# Altium PCB HU_revC.PcbDoc (part 1 of 5)
Units mm, origin at the board's own origin, x right, y up, seen from the top; angles counter-clockwise.
Board outline 391 x 236 mm, 6 copper layers (Top Layer, Layer 1, Layer 2, Layer 3, Layer 4, Bottom Layer), stack 1.538 mm thick; 737 components, 574 nets, 2599 pads, 143 vias.
Unrouted connection lines stored in the file: 1682.
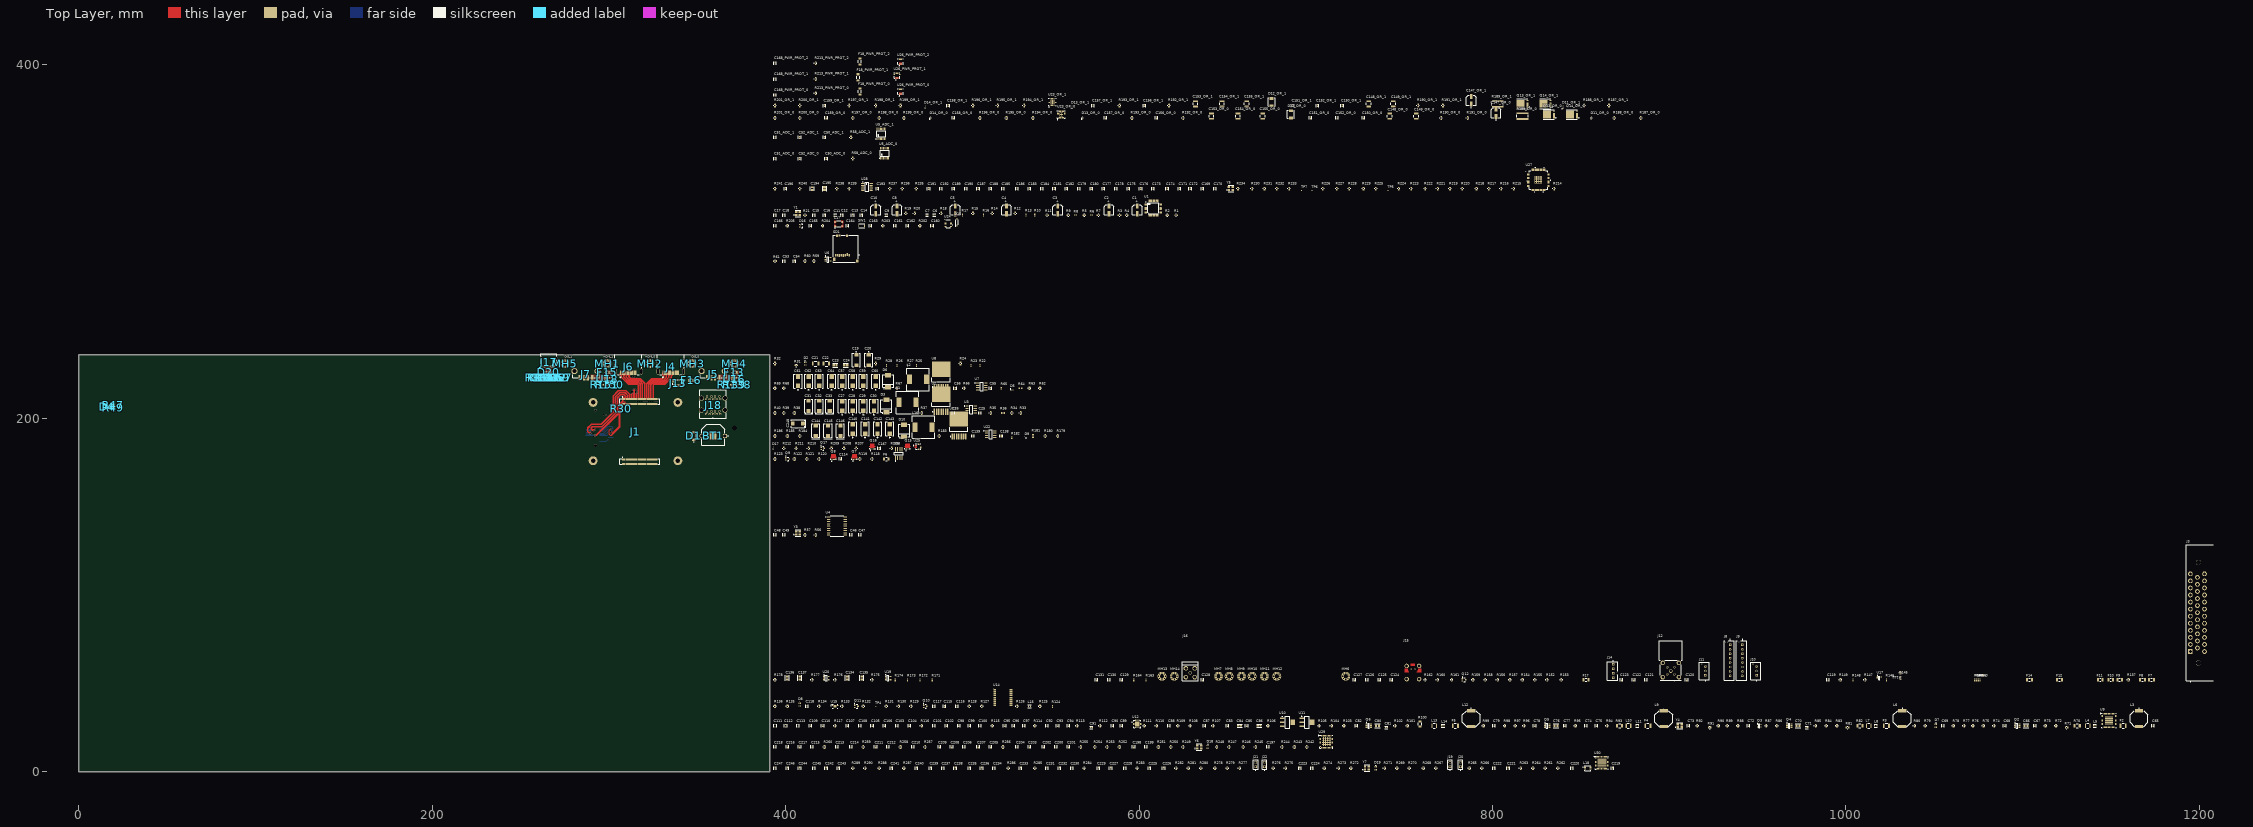
[diagram p0: Top Layer view]
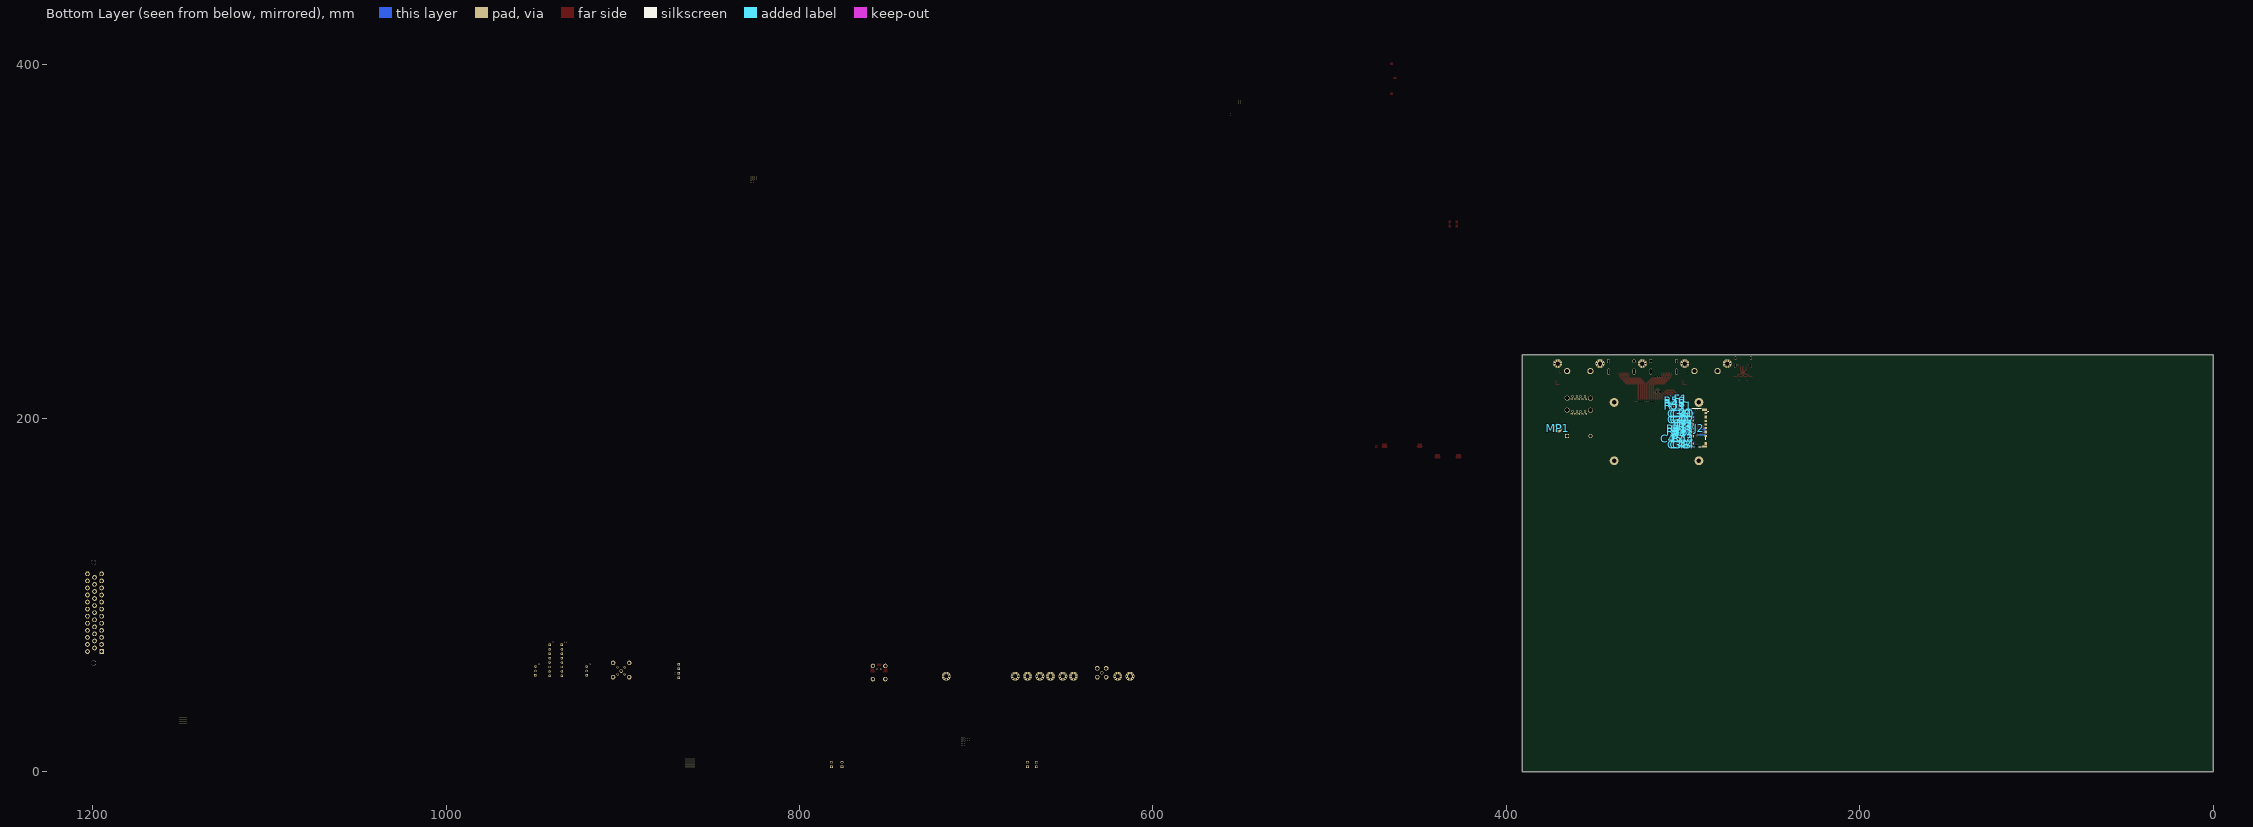
[diagram p1: Bottom Layer view, seen from below]

## Layer stack, top to bottom
Top Solder: solder mask 0.0102, Solder Resist, Dk 3.5
Top Layer: signal copper 0.035
Dielectric 2: prepreg 0.0994, PP-006, Dk 4.1
Layer 1: signal copper 0.0152
Dielectric 3: prepreg 0.55, PP-006, Dk 4.1
Layer 2: signal copper 0.0152
Dielectric 1: dielectric 0.1088, FR-4, Dk 4.8
Layer 3: signal copper 0.0152
Dielectric 4: prepreg 0.55, PP-006, Dk 4.1
Layer 4: signal copper 0.0152
Dielectric 5: prepreg 0.0994, PP-006, Dk 4.1
Bottom Layer: signal copper 0.035
Bottom Solder: solder mask 0.0102, Solder Resist, Dk 3.5

## Board outline
0,0 0,236 391,236 391,0

## Design rules (kind name [scope] priority, off if disabled: settings)
BoardOutlineClearance [All] p1: gap=0.2 ignorepadtopadclearanceinfootprint=FALSE
Clearance IMPEDANCE_CLEARANCE [All vs InDifferentialPairClass('100DIFF') OR InDifferentialPairClass('90DIFF') OR InDifferentialPairClass('85DIFF')] p1: gap=0.089 ignorepadtopadclearanceinfootprint=FALSE except(0.127: Arc-Via Track-Via SMDPad-Via THPad-Via Via-Via Via-Fill Via-Poly Via-Region Via-Text; 0.25: Arc-Hole Track-Hole SMDPad-Hole THPad-Hole Via-Hole Fill-Hole Poly-Hole Region-Hole Text-Hole; 0.5: Arc-Fill Arc-Poly Arc-Region Track-Fill Track-Poly Track-Region SMDPad-Fill SMDPad-Poly SMDPad-Region)
Clearance [All] p2: gap=0.089 ignorepadtopadclearanceinfootprint=FALSE except(0.127: Arc-Via Track-Via SMDPad-Via THPad-Via Via-Via Via-Fill Via-Poly Via-Region Via-Text; 0.25: Arc-Hole Track-Hole SMDPad-Hole THPad-Hole Via-Hole Fill-Hole Poly-Hole Region-Hole Text-Hole)
ComponentClearance [All] p1: gap=0.089 collisioncheckmode=3 verticalgap=0.089 showdistances=TRUE
DiffPairsRouting 85DIFF [InDifferentialPairClass('85DIFF')] p1: maxlimit=0.2 minlimit=0.127 mostfreqgap=0.127 toplayer_mingap=0.2 toplayer_prefgap=0.2 toplayer_minwidth=0.178 toplayer_maxwidth=0.178 toplayer_prefwidth=0.178 midlayer1_maxgap=0.127 midlayer1_minwidth=0.124 midlayer1_maxwidth=0.124 midlayer1_prefwidth=0.124 midlayer2_maxgap=0.127 midlayer2_minwidth=0.119 midlayer2_maxwidth=0.119 midlayer2_prefwidth=0.119 midlayer3_maxgap=0.127 midlayer3_minwidth=0.119 midlayer3_maxwidth=0.119 midlayer3_prefwidth=0.119 midlayer4_maxgap=0.127 midlayer4_minwidth=0.124 midlayer4_maxwidth=0.124 midlayer4_prefwidth=0.124 bottomlayer_mingap=0.2 bottomlayer_prefgap=0.2 bottomlayer_minwidth=0.178 bottomlayer_maxwidth=0.178 bottomlayer_prefwidth=0.178 impedanceprofiledriven=TRUE impedanceprofileid={A2A8C06F-FA96-42DC-BCD0-D0D531981970} impedanceprofilevalue=85.000000 maxuncoupledlength=12.7
DiffPairsRouting 90DIFF [InDifferentialPairClass('90DIFF')] p2: maxlimit=0.2 minlimit=0.127 mostfreqgap=0.127 toplayer_mingap=0.2 toplayer_prefgap=0.2 toplayer_minwidth=0.158 toplayer_maxwidth=0.158 toplayer_prefwidth=0.158 midlayer1_maxgap=0.127 midlayer1_minwidth=0.108 midlayer1_maxwidth=0.108 midlayer1_prefwidth=0.108 midlayer2_maxgap=0.127 midlayer2_minwidth=0.102 midlayer2_maxwidth=0.102 midlayer2_prefwidth=0.102 midlayer3_maxgap=0.127 midlayer3_minwidth=0.102 midlayer3_maxwidth=0.102 midlayer3_prefwidth=0.102 midlayer4_maxgap=0.127 midlayer4_minwidth=0.108 midlayer4_maxwidth=0.108 midlayer4_prefwidth=0.108 bottomlayer_mingap=0.2 bottomlayer_prefgap=0.2 bottomlayer_minwidth=0.158 bottomlayer_maxwidth=0.158 bottomlayer_prefwidth=0.158 impedanceprofiledriven=TRUE impedanceprofileid={85B4657C-B9EF-4066-BB58-2F5B942DC9EC} impedanceprofilevalue=90.000000 maxuncoupledlength=12.7
DiffPairsRouting 100DIFF [InDifferentialPairClass('100DIFF')] p3: maxlimit=0.2 minlimit=0.127 mostfreqgap=0.127 toplayer_mingap=0.2 toplayer_prefgap=0.2 toplayer_minwidth=0.123 toplayer_maxwidth=0.123 toplayer_prefwidth=0.123 midlayer1_maxgap=0.127 midlayer1_minwidth=0.081 midlayer1_maxwidth=0.081 midlayer1_prefwidth=0.081 midlayer2_maxgap=0.127 midlayer2_minwidth=0.076 midlayer2_maxwidth=0.076 midlayer2_prefwidth=0.076 midlayer3_maxgap=0.127 midlayer3_minwidth=0.076 midlayer3_maxwidth=0.076 midlayer3_prefwidth=0.076 midlayer4_maxgap=0.127 midlayer4_minwidth=0.081 midlayer4_maxwidth=0.081 midlayer4_prefwidth=0.081 bottomlayer_mingap=0.2 bottomlayer_prefgap=0.2 bottomlayer_minwidth=0.123 bottomlayer_maxwidth=0.123 bottomlayer_prefwidth=0.123 impedanceprofiledriven=TRUE impedanceprofileid={B7FB8E5D-11C6-4135-B5AE-39F97BF86465} impedanceprofilevalue=100.000000 maxuncoupledlength=12.7
DiffPairsRouting [All] p4: maxlimit=0.089 minlimit=0.089 mostfreqgap=0.089 toplayer_minwidth=0.089 toplayer_maxwidth=1816.048 toplayer_prefwidth=0.089 midlayer1_minwidth=0.089 midlayer1_maxwidth=1816.048 midlayer1_prefwidth=0.089 midlayer2_minwidth=0.089 midlayer2_maxwidth=1816.048 midlayer2_prefwidth=0.089 midlayer3_minwidth=0.089 midlayer3_maxwidth=1816.048 midlayer3_prefwidth=0.089 midlayer4_minwidth=0.089 midlayer4_maxwidth=1816.048 midlayer4_prefwidth=0.089 bottomlayer_minwidth=0.089 bottomlayer_maxwidth=1816.048 bottomlayer_prefwidth=0.089 maxuncoupledlength=12.7
Height [All] p1: minheight=0 maxheight=1816.048 prefheight=12.7
HoleSize [All] p1: absolutevalues=TRUE maxlimit=6.3 minlimit=0.2 maxpercent=80.000 minpercent=20.000
HoleToHoleClearance [All] p1: gap=0.25 allowstackedmicrovias=FALSE
MatchedLengths RGMII_8870_TX [InNetClass('RGMII_8870_TX')] p1: tolerance=1 checknetsindiffpair=FALSE checkdiffpairvsdiffpair=TRUE checkxsignals=TRUE checkothers=TRUE
MatchedLengths RGMII_8870_RX [InNetClass('RGMII_8870_RX')] p2: tolerance=1 checknetsindiffpair=FALSE checkdiffpairvsdiffpair=TRUE checkxsignals=TRUE checkothers=TRUE
MinimumAnnularRing [All] p1: minimumring=0.076
MinimumSolderMaskSliver [All] p1: minsoldermaskwidth=0
PlaneClearance [All] p1: clearance=0.089
PlaneConnect PlaneConnectPowerPads [InPadClass('PowerPads')] p1: planeconnectstyle=Direct reliefexpansion=0.508 reliefentries=4 reliefconductorwidth=0.254 reliefairgap=0.254
PlaneConnect [All] p2: pad.planeconnectstyle=Relief pad.reliefexpansion=0.3 pad.reliefentries=4 pad.reliefconductorwidth=0.089 pad.reliefairgap=0.089 via.planeconnectstyle=Direct via.reliefexpansion=0.3 via.reliefentries=4 via.reliefconductorwidth=0.127 via.reliefairgap=0.127
PolygonConnect PolygonConnectPowerPads [All vs InNetClass('PWR')] p1: connectstyle=Direct reliefconductorwidth=0.254 reliefentries=4 polygonreliefangle="90 Angle" airgapwidth=0.254
PolygonConnect [All] p2: thpad.connectstyle=Relief thpad.reliefconductorwidth=0.089 thpad.reliefentries=4 thpad.polygonreliefangle="90 Angle" thpad.airgapwidth=0.089 smdpad.connectstyle=Relief smdpad.reliefconductorwidth=0.089 smdpad.reliefentries=4 smdpad.polygonreliefangle="90 Angle" smdpad.airgapwidth=0.089 via.connectstyle=Direct via.reliefconductorwidth=0.127 via.reliefentries=4 via.polygonreliefangle="90 Angle" via.airgapwidth=0.127
RoutingVias [All] p1: holewidth=0.2 width=0.45 viastyle="Through Hole" minholewidth=0.2 minwidth=0.45 maxholewidth=6.3 maxwidth=6.55
SilkToSilkClearance [All] p1: silktosilkclearance=0
SilkToSolderMaskClearance [IsPad] p1: minsilkscreentomaskgap=0.089 clearancetoexposedcopper=TRUE
SolderMaskExpansion [All] p1: expansion=0.075 istentingtop=FALSE
SupplyNets "Schematic Supply Nets_34" [InNet('INT_VCC')] p1: voltage=0.000
SupplyNets "Schematic Supply Nets_33" [InNet('AMP_VCC')] p2: voltage=0.000
SupplyNets "Schematic Supply Nets_32" [InNet('3V3_INT')] p3: voltage=0.000
SupplyNets "Schematic Supply Nets_31" [InNet('PRE_VCC')] p4: voltage=0.000
SupplyNets "Schematic Supply Nets_30" [InNet('MATENET_GND')] p5: voltage=0.000
SupplyNets "Schematic Supply Nets_29" [InNet('3V3')] p6: voltage=0.000
SupplyNets "Schematic Supply Nets_28" [InNet('12V0_PoC')] p7: voltage=0.000
SupplyNets "Schematic Supply Nets_27" [InNet('MINIFAKRA_GND')] p8: voltage=0.000
SupplyNets "Schematic Supply Nets_26" [InNet('5V0_INT')] p9: voltage=0.000
SupplyNets "Schematic Supply Nets_25" [InNet('RPI_1V8')] p10: voltage=0.000
SupplyNets "Schematic Supply Nets_24" [InNet('5V0_DISP')] p11: voltage=0.000
SupplyNets "Schematic Supply Nets_23" [InNet('APM_VCC')] p12: voltage=0.000
SupplyNets "Schematic Supply Nets_22" [InNet('ACC_12V')] p13: voltage=0.000
SupplyNets "Schematic Supply Nets_21" [InNet('5V0_RPI')] p14: voltage=0.000
SupplyNets "Schematic Supply Nets_20" [InNet('5V0_MISC')] p15: voltage=0.000
SupplyNets "Schematic Supply Nets_19" [InNet('12V0_MAIN')] p16: voltage=0.000
SupplyNets "Schematic Supply Nets_18" [InNet('1V1')] p17: voltage=0.000
SupplyNets "Schematic Supply Nets_17" [InNet('1V1_USB')] p18: voltage=0.000
SupplyNets "Schematic Supply Nets_16" [InNet('3V3_MISC')] p19: voltage=0.000
SupplyNets "Schematic Supply Nets_15" [InNet('3V3_AUX')] p20: voltage=0.000
SupplyNets "Schematic Supply Nets_14" [InNet('VDDIO_8830')] p21: voltage=0.000
SupplyNets "Schematic Supply Nets_13" [InNet('3V3_MAIN')] p22: voltage=0.000
SupplyNets "Schematic Supply Nets_12" [InNet('MAX96724_3V3')] p23: voltage=0.000
SupplyNets "Schematic Supply Nets_11" [InNet('M2_3V3')] p24: voltage=0.000
SupplyNets "Schematic Supply Nets_10" [InNet('5V0_DAC')] p25: voltage=0.000
SupplyNets "Schematic Supply Nets_9" [InNet('CAR_VCC')] p26: voltage=0.000
SupplyNets "Schematic Supply Nets_8" [InNet('GND')] p27: voltage=0.000
SupplyNets "Schematic Supply Nets_7" [InNet('LAN8870_VBAT')] p28: voltage=0.000
SupplyNets "Schematic Supply Nets_4" [InNet('3V3_USB')] p29: voltage=0.000
SupplyNets "Schematic Supply Nets_3" [InNet('5V0_MAIN')] p30: voltage=0.000
SupplyNets "Schematic Supply Nets_2" [InNet('FAKRA_GND')] p31: voltage=0.000
SupplyNets "Schematic Supply Nets_1" [InNet('LAN8870_VDDIO')] p32: voltage=0.000
SupplyNets "Schematic Supply Nets" [InNet('BAT_12V')] p33: voltage=0.000
Width 50SINGLE [InNetClass('50SINGLE')] p1: maxlimit=1816.048 minlimit=0.089 preferedwidth=0.089
Width [All] p2: maxlimit=1816.048 minlimit=0.089 preferedwidth=0.089
20 further rules are at their usual default settings.

## Classes and differential pairs
differential pair class CAN: CAN PRE_CAN
differential pair class 100DIFF: DPHY0_CK DPHY0_D0 DPHY0_D1 DPHY0_D2 DPHY0_D3 DPHY1_CK DPHY1_D0 DPHY1_D1 DPHY1_D2 DPHY1_D3 ETH_TRD0 ETH_TRD1 ETH_TRD2 ETH_TRD3 HDMI0_CK HDMI0_D0 HDMI0_D1 HDMI0_D2 HDMI1_CK HDMI1_D0 HDMI1_D1 HDMI1_D2 MAX96724_SIOA MAX96724_SIOB MAX96724_SIOC MAX96724_SIOD TRX TRX_CON TRX_TERM
differential pair class 90DIFF: DBG_USB PRE_RC_DBG_USB TUSB4041_USB2_DN0 TUSB4041_USB2_DN1 TUSB4041_USB2_DN2 TUSB4041_USB2_DN3 TUSB4041_USB2_UP USB3_0_RX USB3_0_TX USB3_1_D USB3_1_RX USB3_1_TX
differential pair class 85DIFF: PCIE_CLK PCIE_RX0 PCIE_TX0
channel class LM74910H_PINOUT: OR_0 OR_1
channel class FUSE_AND_I_SENSE: PWR_PROT_0 PWR_PROT_1 PWR_PROT_2
channel class ADC108S022_PINOUT: ADC_0 ADC_1
net class RGMII_8870_TX: LAN8830_CLK125_EN LAN8830_MODE0 LAN8830_MODE1 LAN8830_MODE2 LAN8830_MODE3 LAN8830_MODE4
net class RGMII_8870_RX: LAN8870_RXCTL LAN8870_RXD0 LAN8870_RXD1 LAN8870_RXD2 LAN8870_RXD3 NetU29_25
net class PWR: 1V1_USB 3V3_AUX 3V3_MAIN 3V3_REG_FB 5V0_MAIN 5V_REG_FB 12V0_MAIN 12V0_PoC 12V0_REG_FB AMP_VCC APM_VCC CAR_VCC DISP0_5V DISP1_5V FAKRA_GND INT_VCC LAN8870_VBAT LAN8870_VDDA LAN8870_VDDIO LM74910H_VS_OR_0 LM74910H_VS_OR_1 M2_3V3 MATENET_GND MAX96724_1V2 MAX96724_1V8 MAX96724_PoC_A_V_N MAX96724_PoC_A_V_P MAX96724_PoC_B_V_N MAX96724_PoC_B_V_P MAX96724_PoC_C_V_N MAX96724_PoC_C_V_P MAX96724_PoC_D_V_N MAX96724_PoC_D_V_P MINIFAKRA_GND NetC26_2 NetC27_1 NetC53_1 NetC56_2 NetC57_1 NetC66_1 NetC70_1 NetC76_1 NetC80_1 NetC92_2 NetC95_2 NetC139_2 NetC140_1 NetC150_OR_0_2 NetC150_OR_1_2 NetC206_1 NetC211_1 NetC213_1 NetC216_1 NetC225_1 NetC227_1 NetC231_1 NetC235_1 NetF1_2 NetF2_2 NetF3_2 NetF4_2 NetF5_2 NetF6_2 NetF13_2 NetF15_2 NetF16_1 NetF17_1 NetF18_PWR_PROT_0_2 NetF18_PWR_PROT_1_2 NetF18_PWR_PROT_2_2 NetL4_2 NetL7_2 NetL10_2 NetL13_2 NetQ7_5-6-7-8 NetQ15_5-6-7-8 PRE_VCC RPI_1V8 USBA0_5V USBA1_5V VDDIO_8830
net class 50SINGLE: MAX96724_PoC_A MAX96724_PoC_B MAX96724_PoC_C MAX96724_PoC_D NetC67_2 NetC71_2 NetC77_2 NetC81_2 NetJ16_1 RF_IN
component class USB_HUB_0: C169 C170 C171 C172 C173 C174 C175 C176 C177 C178 C179 C180 C181 C182 C183 C184 C185 C186 C187 C188 C189 C190 C191 C192 C193 C194 C195 C196 R214 R215 R216 R217 R218 R219 R220 R221 R222 R223 R224 R225 R226 R227 R228 R229 R230 R231 R232 R233 R234 R235 R236 R237 R238 R239 R240 R241 TP5 TP6 TP7 U27 U28 Y5
component class USB_DAC_0: C1 C2 C3 C4 C5 C6 C7 C8 C9 C10 C11 C12 C13 C14 C15 C16 C17 C18 R1 R2 R3 R4 R5 R6 R7 R8 R9 R10 R11 R12 R13 R14 R15 R16 R17 R18 R19 R20 R21 U1 Y1
component class TCAN1146_0: C160 C161 C162 C163 C164 C165 C166 D15 D16 L17 R202 R203 R204 R205 SW1 U24
component class SD: C53 C54 R59 R60 R61 SD1 U6
component class RPI_0: BT1 C19 C20 C21 C22 C23 C24 D1 D2 J1 R22 R23 R24 R25 R26 R27 R28 R29 R30 R31 R32
component class REG_2: C55 C56 C57 C58 C59 C60 C61 C62 C63 C64 D5 D6 L2 R62 R63 R64 R65 R66 R67 R68 R69 U7 U8
component class REG_1: C25 C26 C27 C28 C29 C30 C31 C32 C33 D3 L1 R33 R34 R35 R36 R37 R38 R39 R40 U2 U3
component class REG_0: C138 C139 C140 C141 C142 C143 C144 C145 C146 C248 D9 D10 L16 R179 R180 R181 R182 R183 R184 R185 R186 U21 U22
component class PWR_SW_AND_SENSE_0: C167 D17 Q15 Q16 Q17 R206 R207 R208 R209 R210 R211 R212 U25
component class PWR_SW_0: C114 F6 Q7 Q8 Q9 R118 R119 R120 R121 R122 R123 U13
component class PWR_PROT_2: C168_PWR_PROT_2 F18_PWR_PROT_2 R213_PWR_PROT_2 U26_PWR_PROT_2
component class PWR_PROT_1: C168_PWR_PROT_1 F18_PWR_PROT_1 R213_PWR_PROT_1 U26_PWR_PROT_1
component class PWR_PROT_0: C168_PWR_PROT_0 F18_PWR_PROT_0 R213_PWR_PROT_0 U26_PWR_PROT_0
component class OR_1: C147_OR_1 C148_OR_1 C149_OR_1 C150_OR_1 C151_OR_1 C152_OR_1 C153_OR_1 C154_OR_1 C155_OR_1 C156_OR_1 C157_OR_1 C158_OR_1 C159_OR_1 D11_OR_1 D12_OR_1 D13_OR_1 D14_OR_1 Q13_OR_1 Q14_OR_1 R187_OR_1 R188_OR_1 R189_OR_1 R190_OR_1 R191_OR_1 R192_OR_1 R193_OR_1 R194_OR_1 R195_OR_1 R196_OR_1 R197_OR_1 R198_OR_1 R199_OR_1 R200_OR_1 R201_OR_1 U23_OR_1
component class OR_0: C147_OR_0 C148_OR_0 C149_OR_0 C150_OR_0 C151_OR_0 C152_OR_0 C153_OR_0 C154_OR_0 C155_OR_0 C156_OR_0 C157_OR_0 C158_OR_0 C159_OR_0 D11_OR_0 D12_OR_0 D13_OR_0 D14_OR_0 Q13_OR_0 Q14_OR_0 R187_OR_0 R188_OR_0 R189_OR_0 R190_OR_0 R191_OR_0 R192_OR_0 R193_OR_0 R194_OR_0 R195_OR_0 R196_OR_0 R197_OR_0 R198_OR_0 R199_OR_0 R200_OR_0 R201_OR_0 U23_OR_0
component class NVME_0: C36 C37 C38 C39 C40 C41 C42 C43 C44 C45 D4 F1 J2 MP1 R41 R42 R43 R44 R45 R46 R47 R48 R49 R50 R51 TP1 TP2 TP3 U31 Y2
component class MCP2515: C46 C47 C48 C49 R56 R57 U4 Y3
component class HU_revC: C119 C120 C121 C122 C123 C124 C125 C126 C127 C128 C129 C130 C131 C132 C133 C134 C135 C136 C137 D20 F7 F8 F9 F10 F11 F12 F13 F14 F15 F16 F17 J3 J4 J5 J6 J7 J8 J9 J10 J11 J12 J13 J14 J15 J16 J17 J18 MH1 MH2 MH3 MH4 MH5 MH6 MH7 MH8 MH9 MH10 MH11 MH12 MH13 MH14 Q12 R137 R138 R139 R140 R141 R142 R143 R144 R145 R146 R147 R148 R149 R150 R151 R152 R153 R154 R155 R156 R157 R158 R159 R160 R161 R162 R163 R164 R165 R166 R167 R168 R169 R170 R171 R172 R173 R174 R175 R176 R177 R178 U16 U17 U18 U19 U20
component class GPS_0: C115 C116 C117 C118 D8 L15 Q10 Q11 R124 R125 R126 R127 R128 R129 R130 R131 R132 R133 R134 R135 R136 TP4 U14 U15
component class GMSL_DESERIALIZER_0: C65 C66 C67 C68 C69 C70 C71 C72 C73 C74 C75 C76 C77 C78 C79 C80 C81 C82 C83 C84 C85 C86 C87 C88 C89 C90 C91 C92 C93 C94 C95 C96 C97 C98 C99 C100 C101 C102 C103 C104 C105 C106 C107 C108 C109 C110 C111 C112 C113 D7 F2 F3 F4 F5 L3 L4 L5 L6 L7 L8 L9 L10 L11 L12 L13 L14 Q2 Q3 Q4 Q5 Q6 R70 R71 R72 R73 R74 R75 R76 R77 R78 R79 R80 R81 R82 R83 R84 R85 R86 R87 R88 R89 R90 R91 R92 R93 R94 R95 R96 R97 R98 R99 R100 R101 R102 R103 R104 R105 R106 R107 R108 R109 R110 R111 R112 R113 R114 R115 R116 R117 U9 U10 U11 U12 Y4
component class ADC_1: C50_ADC_1 C51_ADC_1 C52_ADC_1 R58_ADC_1 U5_ADC_1
component class ADC_0: C50_ADC_0 C51_ADC_0 C52_ADC_0 R58_ADC_0 U5_ADC_0
component class 1000_BASE_T_PHY: C197 C198 C199 C200 C201 C202 C203 C204 C205 C206 C207 C208 C209 C210 C211 C212 C213 C214 C215 C216 C217 C218 D18 R242 R243 R244 R245 R246 R247 R248 R249 R250 R251 R252 R253 R254 R255 R256 R257 R258 R259 R260 U29 Y6
component class 1000_BASE_T1_PHY: C219 C220 C221 C222 C223 C224 C225 C226 C227 C228 C229 C230 C231 C232 C233 C234 C235 C236 C237 C238 C239 C240 C241 C242 C243 C244 C245 C246 C247 D19 J19 J20 J21 J22 L18 R261 R262 R263 R264 R265 R266 R267 R268 R269 R270 R271 R272 R273 R274 R275 R276 R277 R278 R279 R280 R281 R282 R283 R284 R285 R286 R287 R288 R289 R290 U30 Y7
differential pair USB3_1_TX: +USB3_1_TX_P -USB3_1_TX_N
differential pair USB3_1_RX: +USB3_1_RX_P -USB3_1_RX_N
differential pair USB3_1_D: +USB3_1_D_P -USB3_1_D_N
differential pair USB3_0_TX: +USB3_0_TX_P -USB3_0_TX_N
differential pair USB3_0_RX: +USB3_0_RX_P -USB3_0_RX_N
differential pair TUSB4041_X24: +TUSB4041_X24_P -TUSB4041_X24_N
differential pair TUSB4041_USB2_UP: +TUSB4041_USB2_UP_P -TUSB4041_USB2_UP_N
differential pair TUSB4041_USB2_DN3: +TUSB4041_USB2_DN3_P -TUSB4041_USB2_DN3_N
differential pair TUSB4041_USB2_DN2: +TUSB4041_USB2_DN2_P -TUSB4041_USB2_DN2_N
differential pair TUSB4041_USB2_DN1: +TUSB4041_USB2_DN1_P -TUSB4041_USB2_DN1_N
differential pair TUSB4041_USB2_DN0: +TUSB4041_USB2_DN0_P -TUSB4041_USB2_DN0_N
differential pair TRX: +TRX_P -TRX_N
differential pair TRX_TERM: +TRX_TERM_P -TRX_TERM_N
differential pair TRX_CON: +TRX_CON_P -TRX_CON_N
differential pair PRE_RC_DBG_USB: +PRE_RC_DBG_USB_P -PRE_RC_DBG_USB_N
differential pair PRE_CAN: +PRE_CAN_P -PRE_CAN_N
differential pair PCIE_TX0: +PCIE_TX0_P -PCIE_TX0_N
differential pair PCIE_RX0: +PCIE_RX0_P -PCIE_RX0_N
differential pair PCIE_CLK: +PCIE_CLK_P -PCIE_CLK_N
differential pair MCP2515_X: +MCP2515_X_P -MCP2515_X_N
differential pair MAX96724_X: +MAX96724_X_P -MAX96724_X_N
differential pair MAX96724_SIOD: +MAX96724_SIOD_P -MAX96724_SIOD_N
differential pair MAX96724_SIOC: +MAX96724_SIOC_P -MAX96724_SIOC_N
differential pair MAX96724_SIOB: +MAX96724_SIOB_P -MAX96724_SIOB_N
differential pair MAX96724_SIOA: +MAX96724_SIOA_P -MAX96724_SIOA_N
differential pair MAX96724_PoC_D_V: +MAX96724_PoC_D_V_P -MAX96724_PoC_D_V_N
differential pair MAX96724_PoC_C_V: +MAX96724_PoC_C_V_P -MAX96724_PoC_C_V_N
differential pair MAX96724_PoC_B_V: +MAX96724_PoC_B_V_P -MAX96724_PoC_B_V_N
differential pair MAX96724_PoC_A_V: +MAX96724_PoC_A_V_P -MAX96724_PoC_A_V_N
differential pair LAN8870_X25: +LAN8870_X25_P -LAN8870_X25_N
differential pair LAN8830_X25: +LAN8830_X25_P -LAN8830_X25_N
differential pair HDMI1_D2: +HDMI1_D2_P -HDMI1_D2_N
differential pair HDMI1_D1: +HDMI1_D1_P -HDMI1_D1_N
differential pair HDMI1_D0: +HDMI1_D0_P -HDMI1_D0_N
differential pair HDMI1_CK: +HDMI1_CK_P -HDMI1_CK_N
differential pair HDMI0_D2: +HDMI0_D2_P -HDMI0_D2_N
differential pair HDMI0_D1: +HDMI0_D1_P -HDMI0_D1_N
differential pair HDMI0_D0: +HDMI0_D0_P -HDMI0_D0_N
differential pair HDMI0_CK: +HDMI0_CK_P -HDMI0_CK_N
differential pair ETH_TRD3: +ETH_TRD3_P -ETH_TRD3_N
differential pair ETH_TRD2: +ETH_TRD2_P -ETH_TRD2_N
differential pair ETH_TRD1: +ETH_TRD1_P -ETH_TRD1_N
differential pair ETH_TRD0: +ETH_TRD0_P -ETH_TRD0_N
differential pair DPHY1_D3: +DPHY1_D3_P -DPHY1_D3_N
differential pair DPHY1_D2: +DPHY1_D2_P -DPHY1_D2_N
differential pair DPHY1_D1: +DPHY1_D1_P -DPHY1_D1_N
differential pair DPHY1_D0: +DPHY1_D0_P -DPHY1_D0_N
differential pair DPHY1_CK: +DPHY1_CK_P -DPHY1_CK_N
differential pair DPHY0_D3: +DPHY0_D3_P -DPHY0_D3_N
differential pair DPHY0_D2: +DPHY0_D2_P -DPHY0_D2_N
differential pair DPHY0_D1: +DPHY0_D1_P -DPHY0_D1_N
differential pair DPHY0_D0: +DPHY0_D0_P -DPHY0_D0_N
differential pair DPHY0_CK: +DPHY0_CK_P -DPHY0_CK_N
differential pair DBG_USB: +DBG_USB_P -DBG_USB_N
differential pair "CM6206 _X": +"CM6206 _X_P" -"CM6206 _X_N"
differential pair CAN: +CAN_P -CAN_N

## Components (designator, comment, footprint, x,y, rotation, side; value= is the part's Value field where it differs from the comment)
BT1 "3001" KSTN-3001_V 359,190 r180 top
C1 "875105242010" WCAP-PSLP_D5H5.5 599.001,318 r90 top
C2 "875105242010" WCAP-PSLP_D5H5.5 583.001,318 r90 top
C3 "875105242010" WCAP-PSLP_D5H5.5 554.001,318 r90 top
C4 "875105242010" WCAP-PSLP_D5H5.5 525.001,318 r90 top
C5 "875105242010" WCAP-PSLP_D5H5.5 496.001,318 r90 top
C6 "100n" FP-0402-L_1_0_0_05-W_0_5-IPC_A 484.001,315 r0 top
C7 "100n" FP-0402-L_1_0_0_05-W_0_5-IPC_A 480.001,315 r0 top
C8 "875105242010" WCAP-PSLP_D5H5.5 463.001,318 r90 top
C9 "100n" FP-0402-L_1_0_0_05-W_0_5-IPC_A 457.001,315 r0 top
C10 "875105242010" WCAP-PSLP_D5H5.5 451.001,318 r90 top
C11 "10u" FP-0402-L_1_0_0_05-W_0_5-IPC_A 428.001,315 r0 top
C12 "100n" FP-0402-L_1_0_0_05-W_0_5-IPC_A 432.001,315 r90 top
C13 "10u" FP-0402-L_1_0_0_05-W_0_5-IPC_A 438.001,315 r90 top
C14 "100n" FP-0402-L_1_0_0_05-W_0_5-IPC_A 443.001,315 r90 top
C15 "10u" FP-0402-L_1_0_0_05-W_0_5-IPC_A 416.001,315 r90 top
C16 "100n" FP-0402-L_1_0_0_05-W_0_5-IPC_A 422.001,315 r90 top
C17 "10p" FP-0402-L_1_0_0_05-W_0_5-IPC_A 394.001,315 r90 top
C18 "10p" FP-0402-L_1_0_0_05-W_0_5-IPC_A 399.001,315 r90 top
C19 "T491X107K025AT" FP-T491X107K025AT-MFG 440.001,233 r90 top
C20 "T491X107K025AT" FP-T491X107K025AT-MFG 447.001,233 r90 top
C21 "C3225X7R1H106M250AC" FP-C3225-250-0_4-MFG 417.001,231 r0 top
C22 "C3225X7R1H106M250AC" FP-C3225-250-0_4-MFG 423.001,231 r0 top
C23 "GRM21BR61E226ME44L" FP-GRM21B-0_2-e0_2_0_7-IPC_B 428.001,230 r0 top
C24 "GRM21BR61E226ME44L" FP-GRM21B-0_2-e0_2_0_7-IPC_B 434.001,230 r0 top
C25 "100n" FP-0402-L_1_0_0_05-W_0_5-IPC_A 510.001,203 r90 top
C26 "10n" FP-0402-L_1_0_0_05-W_0_5-IPC_A 495.001,203 r90 top
C27 "T495D106M035ATE260" T495D106M035ATE260-Footprint-1 432.001,207 r90 top value=10µF
C28 "T495D106M035ATE260" T495D106M035ATE260-Footprint-1 438.001,207 r90 top value=10µF
C29 "T495D106M035ATE260" T495D106M035ATE260-Footprint-1 444.001,207 r90 top value=10µF
C30 "T495D106M035ATE260" T495D106M035ATE260-Footprint-1 450.001,207 r90 top value=10µF
C31 "T495D157K010ATE100" KEMT-T495-D_L 413.001,207 r90 top
C32 "T495D157K010ATE100" KEMT-T495-D_L 419.001,207 r90 top
C33 "T495D157K010ATE100" KEMT-T495-D_L 425.001,207 r90 top
C36 "10u" FP-0402-L_1_0_0_05-W_0_5-IPC_A 302.5,202.5 r270 bottom
C37 "10u" FP-0402-L_1_0_0_05-W_0_5-IPC_A 302.5,199.25 r270 bottom
C38 "10u" FP-0402-L_1_0_0_05-W_0_5-IPC_A 302.5,185 r270 bottom
C39 "100n" FP-0402-L_1_0_0_05-W_0_5-IPC_A 301,202.5 r270 bottom
C40 "100n" FP-0402-L_1_0_0_05-W_0_5-IPC_A 299.5,202.5 r270 bottom
C41 "100n" FP-0402-L_1_0_0_05-W_0_5-IPC_A 301,199.25 r270 bottom
C42 "100n" FP-0402-L_1_0_0_05-W_0_5-IPC_A 299.5,199.25 r270 bottom
C43 "100n" FP-0402-L_1_0_0_05-W_0_5-IPC_A 301,185 r270 bottom
C44 "100n" FP-0402-L_1_0_0_05-W_0_5-IPC_A 299.5,185 r270 bottom
C45 "100n" FP-0402-L_1_0_0_05-W_0_5-IPC_A 306.5,188.5 r90 bottom
C46 "10u" FP-0402-L_1_0_0_05-W_0_5-IPC_A 437.001,134 r90 top
C47 "100n" FP-0402-L_1_0_0_05-W_0_5-IPC_A 442.001,134 r90 top
C48 "14p" FP-0402-L_1_0_0_05-W_0_5-IPC_A 394.001,134 r90 top
C49 "14p" FP-0402-L_1_0_0_05-W_0_5-IPC_A 399.001,134 r90 top
C50_ADC_0 "100n" FP-0402-L_1_0_0_05-W_0_5-IPC_A 423.001,347 r90 top (schematic designator C50)
C50_ADC_1 "100n" FP-0402-L_1_0_0_05-W_0_5-IPC_A 422.001,359 r90 top (schematic designator C50)
C51_ADC_0 "100n" FP-0402-L_1_0_0_05-W_0_5-IPC_A 394.001,347 r90 top (schematic designator C51)
C51_ADC_1 "100n" FP-0402-L_1_0_0_05-W_0_5-IPC_A 394.001,359 r90 top (schematic designator C51)
C52_ADC_0 "100n" FP-0402-L_1_0_0_05-W_0_5-IPC_A 408.001,347 r90 top (schematic designator C52)
C52_ADC_1 "100n" FP-0402-L_1_0_0_05-W_0_5-IPC_A 408.001,359 r90 top (schematic designator C52)
C53 "10u" FP-0402-L_1_0_0_05-W_0_5-IPC_A 399.001,289 r90 top
C54 "100n" FP-0402-L_1_0_0_05-W_0_5-IPC_A 405.001,289 r90 top
C55 "100n" FP-0402-L_1_0_0_05-W_0_5-IPC_A 516.001,217 r90 top
C56 "10n" FP-0402-L_1_0_0_05-W_0_5-IPC_A 496.001,217 r90 top
C57 "T495D475K050ATE300" T495D475K050ATE300-Footprint-1 432.001,221 r90 top value=4.7µF
C58 "T495D475K050ATE300" T495D475K050ATE300-Footprint-1 438.001,221 r90 top value=4.7µF
C59 "T495D475K050ATE300" T495D475K050ATE300-Footprint-1 444.001,221 r90 top value=4.7µF
C60 "T495D475K050ATE300" T495D475K050ATE300-Footprint-1 451.001,221 r90 top value=4.7µF
C61 "T495X107K020ATE150" T495D337K010ATE150-Footprint-1 407.001,221 r90 top value=330µF
C62 "T495X107K020ATE150" T495D337K010ATE150-Footprint-1 413.001,221 r90 top value=330µF
C63 "T495X107K020ATE150" T495D337K010ATE150-Footprint-1 419.001,221 r90 top value=330µF
C64 "DNP" T495D337K010ATE150-Footprint-1 426.001,221 r90 top value=330µF
C65 "100n" FP-0402-L_1_0_0_05-W_0_5-IPC_A 1174.001,26 r90 top
C66 "GRM21BR61E226ME44L" FP-GRM21B-0_2-e0_2_0_7-IPC_B 1102.001,26 r0 top
C67 "100n" FP-0402-L_1_0_0_05-W_0_5-IPC_A 1107.001,26 r90 top
C68 "100n" FP-0402-L_1_0_0_05-W_0_5-IPC_A 1090.001,26 r90 top
C69 "100n" FP-0402-L_1_0_0_05-W_0_5-IPC_A 1055.001,26 r90 top
C70 "GRM21BR61E226ME44L" FP-GRM21B-0_2-e0_2_0_7-IPC_B 973.001,26 r0 top
C71 "100n" FP-0402-L_1_0_0_05-W_0_5-IPC_A 978.001,25 r0 top
C72 "100n" FP-0402-L_1_0_0_05-W_0_5-IPC_A 945.001,26 r90 top
C73 "100n" FP-0402-L_1_0_0_05-W_0_5-IPC_A 911.001,26 r90 top
C74 "30p" FP-0402-L_1_0_0_05-W_0_5-IPC_A 853.001,26 r90 top
C75 "30p" FP-0402-L_1_0_0_05-W_0_5-IPC_A 859.001,26 r90 top
C76 "GRM21BR61E226ME44L" FP-GRM21B-0_2-e0_2_0_7-IPC_B 836.001,26 r0 top
C77 "100n" FP-0402-L_1_0_0_05-W_0_5-IPC_A 841.001,26 r90 top
C78 "100n" FP-0402-L_1_0_0_05-W_0_5-IPC_A 824.001,26 r90 top
C79 "100n" FP-0402-L_1_0_0_05-W_0_5-IPC_A 801.001,26 r90 top
C80 "GRM21BR61E226ME44L" FP-GRM21B-0_2-e0_2_0_7-IPC_B 735.001,26 r0 top
C81 "100n" FP-0402-L_1_0_0_05-W_0_5-IPC_A 740.001,25 r0 top
C82 "100n" FP-0402-L_1_0_0_05-W_0_5-IPC_A 723.001,26 r90 top
C83 "100n" FP-0402-L_1_0_0_05-W_0_5-IPC_A 650.001,26 r90 top
C84 "GRM188R60J106ME47D" FP-GRM188-0_1-e0_2_0_55-IPC_A 657.001,26 r0 top
C85 "100n" FP-0402-L_1_0_0_05-W_0_5-IPC_A 661.001,26 r90 top
C86 "GRM188R60J106ME47D" FP-GRM188-0_1-e0_2_0_55-IPC_A 668.001,26 r0 top
C87 "DNP" FP-0402-L_1_0_0_05-W_0_5-IPC_A 637.001,26 r90 top
C88 "DNP" FP-0402-L_1_0_0_05-W_0_5-IPC_A 617.001,26 r90 top
C89 "DNP" FP-0402-L_1_0_0_05-W_0_5-IPC_A 590.001,26 r90 top
C90 "100n" FP-0402-L_1_0_0_05-W_0_5-IPC_A 585.001,26 r90 top
C91 "100n" FP-0402-L_1_0_0_05-W_0_5-IPC_A 573.001,25 r0 top
C92 "10u" FP-0402-L_1_0_0_05-W_0_5-IPC_A 548.001,26 r90 top
C93 "100n" FP-0402-L_1_0_0_05-W_0_5-IPC_A 554.001,26 r90 top
C94 "100n" FP-0402-L_1_0_0_05-W_0_5-IPC_A 560.001,26 r90 top
C95 "10u" FP-0402-L_1_0_0_05-W_0_5-IPC_A 524.001,26 r90 top
C96 "100n" FP-0402-L_1_0_0_05-W_0_5-IPC_A 529.001,26 r90 top
C97 "100n" FP-0402-L_1_0_0_05-W_0_5-IPC_A 535.001,26 r90 top
C98 "100n" FP-0402-L_1_0_0_05-W_0_5-IPC_A 498.001,26 r90 top
C99 "10n" FP-0402-L_1_0_0_05-W_0_5-IPC_A 504.001,26 r90 top
C100 "DNP" FP-0402-L_1_0_0_05-W_0_5-IPC_A 510.001,26 r90 top
C101 "100n" FP-0402-L_1_0_0_05-W_0_5-IPC_A 484.001,26 r90 top
C102 "10n" FP-0402-L_1_0_0_05-W_0_5-IPC_A 491.001,26 r90 top
C103 "100n" FP-0402-L_1_0_0_05-W_0_5-IPC_A 463.001,26 r90 top
C104 "10n" FP-0402-L_1_0_0_05-W_0_5-IPC_A 470.001,26 r90 top
C105 "100n" FP-0402-L_1_0_0_05-W_0_5-IPC_A 449.001,26 r90 top
C106 "10n" FP-0402-L_1_0_0_05-W_0_5-IPC_A 456.001,26 r90 top
C107 "100n" FP-0402-L_1_0_0_05-W_0_5-IPC_A 435.001,26 r90 top
C108 "10n" FP-0402-L_1_0_0_05-W_0_5-IPC_A 442.001,26 r90 top
C109 "100n" FP-0402-L_1_0_0_05-W_0_5-IPC_A 414.001,26 r90 top
C110 "10n" FP-0402-L_1_0_0_05-W_0_5-IPC_A 421.001,26 r90 top
C111 "EMK107BBJ106MA-T" FP-0603-L_1_6_0_2-W_0_8_0-MFG 394.001,26 r90 top
C112 "EMK107BBJ106MA-T" FP-0603-L_1_6_0_2-W_0_8_0-MFG 400.001,26 r90 top
C113 "EMK107BBJ106MA-T" FP-0603-L_1_6_0_2-W_0_8_0-MFG 407.001,26 r90 top
C114 "100n" FP-0402-L_1_0_0_05-W_0_5-IPC_A 431.001,177 r90 top
C115 "100n" FP-0402-L_1_0_0_05-W_0_5-IPC_A 490.001,37 r90 top
C116 "10u" FP-0402-L_1_0_0_05-W_0_5-IPC_A 497.001,37 r90 top
C117 "10n" FP-0402-L_1_0_0_05-W_0_5-IPC_A 484.001,37 r90 top
C118 "100n" FP-0402-L_1_0_0_05-W_0_5-IPC_A 412.001,37 r90 top
C119 "100n" FP-0402-L_1_0_0_05-W_0_5-IPC_A 990.001,52 r90 top
C120 "JUMP" FP-0402-L_1_0_0_05-W_0_5-IPC_A 910.001,52 r90 top
C121 "JUMP" FP-0402-L_1_0_0_05-W_0_5-IPC_A 887.001,52 r90 top
C122 "JUMP" FP-0402-L_1_0_0_05-W_0_5-IPC_A 880.001,52 r90 top
C123 "JUMP" FP-0402-L_1_0_0_05-W_0_5-IPC_A 873.001,52 r90 top
C124 "JUMP" FP-0402-L_1_0_0_05-W_0_5-IPC_A 743.001,52 r90 top
C125 "JUMP" FP-0402-L_1_0_0_05-W_0_5-IPC_A 736.001,52 r90 top
C126 "JUMP" FP-0402-L_1_0_0_05-W_0_5-IPC_A 729.001,52 r90 top
C127 "JUMP" FP-0402-L_1_0_0_05-W_0_5-IPC_A 722.001,52 r90 top
C128 "JUMP" FP-0402-L_1_0_0_05-W_0_5-IPC_A 636.001,52 r90 top
C129 "JUMP" FP-0402-L_1_0_0_05-W_0_5-IPC_A 590.001,52 r90 top
C130 "JUMP" FP-0402-L_1_0_0_05-W_0_5-IPC_A 583.001,52 r90 top
C131 "JUMP" FP-0402-L_1_0_0_05-W_0_5-IPC_A 576.001,52 r90 top
C132 "22p" FP-0402-L_1_0_0_05-W_0_5-IPC_A 268.25,223 r270 top
C133 "22p" FP-0402-L_1_0_0_05-W_0_5-IPC_A 263.75,223 r270 top
C134 "GRM21BR61E226ME44L" FP-GRM21B-0_2-e0_2_0_7-IPC_B 435.001,53 r90 top
C135 "GRM21BR61E226ME44L" FP-GRM21B-0_2-e0_2_0_7-IPC_B 443.001,53 r90 top
C136 "GRM21BR61E226ME44L" FP-GRM21B-0_2-e0_2_0_7-IPC_B 401.001,53 r90 top
C137 "GRM21BR61E226ME44L" FP-GRM21B-0_2-e0_2_0_7-IPC_B 408.001,53 r90 top
C138 "100n" FP-0402-L_1_0_0_05-W_0_5-IPC_A 522.001,190 r90 top
C139 "10n" FP-0402-L_1_0_0_05-W_0_5-IPC_A 506.001,190 r90 top
C140 "T495D106M035ATE260" T495D106M035ATE260-Footprint-1 438.001,194 r90 top value=10µF
C141 "T495D106M035ATE260" T495D106M035ATE260-Footprint-1 445.001,194 r90 top value=10µF
C142 "T495D106M035ATE260" T495D106M035ATE260-Footprint-1 452.001,194 r90 top value=10µF
C143 "T495D106M035ATE260" T495D106M035ATE260-Footprint-1 459.001,194 r90 top value=10µF
C144 "T495D686K020ATE150" KEMT-T495-D_L 417.001,193 r90 top
C145 "T495D686K020ATE150" KEMT-T495-D_L 424.001,193 r90 top
C146 "T495D686K020ATE150" KEMT-T495-D_L 431.001,193 r90 top
C147_OR_0 "EEE-FK1H100UR" FP-FKC-MFG 802.001,373 r90 top (schematic designator C147)
C147_OR_1 "EEE-FK1H100UR" FP-FKC-MFG 788.001,380 r90 top (schematic designator C147)
C148_OR_0 "12103D106KAT2A" FP-1210-L_3_3_0_4-W_2_5_0-MFG 742.001,371 r90 top (schematic designator C148)
C148_OR_1 "12103D106KAT2A" FP-1210-L_3_3_0_4-W_2_5_0-MFG 730.001,378 r90 top (schematic designator C148)
C149_OR_0 "12103D106KAT2A" FP-1210-L_3_3_0_4-W_2_5_0-MFG 757.001,371 r90 top (schematic designator C149)
C149_OR_1 "12103D106KAT2A" FP-1210-L_3_3_0_4-W_2_5_0-MFG 744.001,378 r90 top (schematic designator C149)
C150_OR_0 "10n" FP-0402-L_1_0_0_05-W_0_5-IPC_A 727.001,370 r90 top (schematic designator C150)
C150_OR_1 "10n" FP-0402-L_1_0_0_05-W_0_5-IPC_A 715.001,377 r90 top (schematic designator C150)
C151_OR_0 "100n" FP-0402-L_1_0_0_05-W_0_5-IPC_A 697.001,370 r90 top (schematic designator C151)
C151_OR_1 "100n" FP-0402-L_1_0_0_05-W_0_5-IPC_A 687.001,377 r90 top (schematic designator C151)
C152_OR_0 "100n" FP-0402-L_1_0_0_05-W_0_5-IPC_A 712.001,370 r90 top (schematic designator C152)
C152_OR_1 "100n" FP-0402-L_1_0_0_05-W_0_5-IPC_A 701.001,377 r90 top (schematic designator C152)
C153_OR_0 "AC1210KKX7R0BB104" FP-AC1210-0_85-MFG 641.001,371 r90 top value="100 nF" (schematic designator C153)
C153_OR_1 "AC1210KKX7R0BB104" FP-AC1210-0_85-MFG 632.001,378 r90 top value="100 nF" (schematic designator C153)
C154_OR_0 "AC1210KKX7R0BB104" FP-AC1210-0_85-MFG 656.001,371 r90 top value="100 nF" (schematic designator C154)
C154_OR_1 "AC1210KKX7R0BB104" FP-AC1210-0_85-MFG 647.001,378 r90 top value="100 nF" (schematic designator C154)
C155_OR_0 "AC1210KKX7R0BB104" FP-AC1210-0_85-MFG 670.001,371 r90 top value="100 nF" (schematic designator C155)
C155_OR_1 "AC1210KKX7R0BB104" FP-AC1210-0_85-MFG 661.001,378 r90 top value="100 nF" (schematic designator C155)
C156_OR_0 "10n" FP-0402-L_1_0_0_05-W_0_5-IPC_A 610.001,370 r90 top (schematic designator C156)
C156_OR_1 "10n" FP-0402-L_1_0_0_05-W_0_5-IPC_A 603.001,377 r90 top (schematic designator C156)
C157_OR_0 "10n" FP-0402-L_1_0_0_05-W_0_5-IPC_A 581.001,370 r90 top (schematic designator C157)
C157_OR_1 "10n" FP-0402-L_1_0_0_05-W_0_5-IPC_A 574.001,377 r90 top (schematic designator C157)
C158_OR_0 "100n" FP-0402-L_1_0_0_05-W_0_5-IPC_A 495.001,370 r90 top (schematic designator C158)
C158_OR_1 "100n" FP-0402-L_1_0_0_05-W_0_5-IPC_A 492.001,377 r90 top (schematic designator C158)
C159_OR_0 "100n" FP-0402-L_1_0_0_05-W_0_5-IPC_A 423.001,370 r90 top (schematic designator C159)
C159_OR_1 "100n" FP-0402-L_1_0_0_05-W_0_5-IPC_A 422.001,377 r90 top (schematic designator C159)
C160 "100n" FP-0402-L_1_0_0_05-W_0_5-IPC_A 483.001,309 r90 top
C161 "100n" FP-0402-L_1_0_0_05-W_0_5-IPC_A 462.001,309 r90 top
C162 "100n" FP-0402-L_1_0_0_05-W_0_5-IPC_A 469.001,309 r90 top
C163 "100n" FP-0402-L_1_0_0_05-W_0_5-IPC_A 448.001,309 r90 top
C164 "DNP" FP-0402-L_1_0_0_05-W_0_5-IPC_A 435.001,309 r90 top
C165 "100n" FP-0402-L_1_0_0_05-W_0_5-IPC_A 414.001,309 r90 top
C166 "DNP" FP-0402-L_1_0_0_05-W_0_5-IPC_A 394.001,309 r90 top
C167 "100n" FP-0402-L_1_0_0_05-W_0_5-IPC_A 453.001,183 r90 top
C168_PWR_PROT_0 "100n" FP-0402-L_1_0_0_05-W_0_5-IPC_A 394.001,383 r90 top (schematic designator C168)
C168_PWR_PROT_1 "100n" FP-0402-L_1_0_0_05-W_0_5-IPC_A 394.001,392 r90 top (schematic designator C168)
C168_PWR_PROT_2 "100n" FP-0402-L_1_0_0_05-W_0_5-IPC_A 394.001,401 r90 top (schematic designator C168)
C169 "30p" FP-0402-L_1_0_0_05-W_0_5-IPC_A 636.001,330 r90 top
C170 "30p" FP-0402-L_1_0_0_05-W_0_5-IPC_A 643.001,330 r90 top
C171 "100n" FP-0402-L_1_0_0_05-W_0_5-IPC_A 623.001,330 r90 top
C172 "10n" FP-0402-L_1_0_0_05-W_0_5-IPC_A 629.001,330 r90 top
C173 "100n" FP-0402-L_1_0_0_05-W_0_5-IPC_A 608.001,330 r90 top
C174 "10n" FP-0402-L_1_0_0_05-W_0_5-IPC_A 616.001,330 r90 top
C175 "100n" FP-0402-L_1_0_0_05-W_0_5-IPC_A 594.001,330 r90 top
C176 "10n" FP-0402-L_1_0_0_05-W_0_5-IPC_A 601.001,330 r90 top
C177 "100n" FP-0402-L_1_0_0_05-W_0_5-IPC_A 580.001,330 r90 top
C178 "10n" FP-0402-L_1_0_0_05-W_0_5-IPC_A 587.001,330 r90 top
C179 "100n" FP-0402-L_1_0_0_05-W_0_5-IPC_A 566.001,330 r90 top
C180 "10n" FP-0402-L_1_0_0_05-W_0_5-IPC_A 573.001,330 r90 top
C181 "100n" FP-0402-L_1_0_0_05-W_0_5-IPC_A 552.001,330 r90 top
C182 "10n" FP-0402-L_1_0_0_05-W_0_5-IPC_A 559.001,330 r90 top
C183 "100n" FP-0402-L_1_0_0_05-W_0_5-IPC_A 538.001,330 r90 top
C184 "10n" FP-0402-L_1_0_0_05-W_0_5-IPC_A 545.001,330 r90 top
C185 "100n" FP-0402-L_1_0_0_05-W_0_5-IPC_A 523.001,330 r90 top
C186 "10n" FP-0402-L_1_0_0_05-W_0_5-IPC_A 531.001,330 r90 top
C187 "100n" FP-0402-L_1_0_0_05-W_0_5-IPC_A 509.001,330 r90 top
C188 "10n" FP-0402-L_1_0_0_05-W_0_5-IPC_A 516.001,330 r90 top
C189 "100n" FP-0402-L_1_0_0_05-W_0_5-IPC_A 495.001,330 r90 top
C190 "10n" FP-0402-L_1_0_0_05-W_0_5-IPC_A 502.001,330 r90 top
C191 "100n" FP-0402-L_1_0_0_05-W_0_5-IPC_A 481.001,330 r90 top
C192 "10n" FP-0402-L_1_0_0_05-W_0_5-IPC_A 488.001,330 r90 top
C193 "10u" FP-0402-L_1_0_0_05-W_0_5-IPC_A 452.001,330 r90 top
C194 "C0805C475J4RACAUTO" FP-C0805C475J4RACAUTO-MFG 415.001,330 r90 top
C195 "GRM21BR61E226ME44L" FP-GRM21B-0_2-e0_2_0_7-IPC_B 422.001,330 r90 top
C196 "100n" FP-0402-L_1_0_0_05-W_0_5-IPC_A 400.001,330 r90 top
C197 "1u" FP-0402-L_1_0_0_05-W_0_5-IPC_A 673.001,14 r90 top
C198 "30p" FP-0402-L_1_0_0_05-W_0_5-IPC_A 597.001,14 r90 top
C199 "30p" FP-0402-L_1_0_0_05-W_0_5-IPC_A 604.001,14 r90 top
C200 "1u" FP-0402-L_1_0_0_05-W_0_5-IPC_A 553.001,14 r90 top
C201 "100n" FP-0402-L_1_0_0_05-W_0_5-IPC_A 560.001,14 r90 top
C202 "100n" FP-0402-L_1_0_0_05-W_0_5-IPC_A 546.001,14 r90 top
C203 "100n" FP-0402-L_1_0_0_05-W_0_5-IPC_A 538.001,14 r90 top
C204 "100n" FP-0402-L_1_0_0_05-W_0_5-IPC_A 531.001,14 r90 top
C205 "100n" FP-0402-L_1_0_0_05-W_0_5-IPC_A 516.001,14 r90 top
C206 "10u" FP-0402-L_1_0_0_05-W_0_5-IPC_A 501.001,14 r90 top
C207 "100n" FP-0402-L_1_0_0_05-W_0_5-IPC_A 509.001,14 r90 top
C208 "100n" FP-0402-L_1_0_0_05-W_0_5-IPC_A 494.001,14 r90 top
C209 "100n" FP-0402-L_1_0_0_05-W_0_5-IPC_A 487.001,14 r90 top
C210 "100n" FP-0402-L_1_0_0_05-W_0_5-IPC_A 472.001,14 r90 top
C211 "1u" FP-0402-L_1_0_0_05-W_0_5-IPC_A 451.001,14 r90 top
C212 "100n" FP-0402-L_1_0_0_05-W_0_5-IPC_A 458.001,14 r90 top
C213 "10u" FP-0402-L_1_0_0_05-W_0_5-IPC_A 429.001,14 r90 top
C214 "100n" FP-0402-L_1_0_0_05-W_0_5-IPC_A 437.001,14 r90 top
C215 "100n" FP-0402-L_1_0_0_05-W_0_5-IPC_A 415.001,14 r90 top
C216 "1u" FP-0402-L_1_0_0_05-W_0_5-IPC_A 401.001,14 r90 top
C217 "100n" FP-0402-L_1_0_0_05-W_0_5-IPC_A 408.001,14 r90 top
C218 "100n" FP-0402-L_1_0_0_05-W_0_5-IPC_A 394.001,14 r90 top
C219 "100n" FP-0402-L_1_0_0_05-W_0_5-IPC_A 868.001,2 r90 top
C220 "100n" FP-0402-L_1_0_0_05-W_0_5-IPC_A 845.001,2 r90 top
C221 "4.7n" FP-0402-L_1_0_0_05-W_0_5-IPC_A 809.001,2 r90 top
C222 "1u" FP-0402-L_1_0_0_05-W_0_5-IPC_A 801.001,2 r90 top
C223 "30p" FP-0402-L_1_0_0_05-W_0_5-IPC_A 691.001,2 r90 top
C224 "30p" FP-0402-L_1_0_0_05-W_0_5-IPC_A 698.001,2 r90 top
C225 "4.7u" FP-0402-L_1_0_0_05-W_0_5-IPC_A 606.001,2 r90 top
C226 "100n" FP-0402-L_1_0_0_05-W_0_5-IPC_A 614.001,2 r90 top
C227 "1u" FP-0402-L_1_0_0_05-W_0_5-IPC_A 584.001,2 r90 top
C228 "100n" FP-0402-L_1_0_0_05-W_0_5-IPC_A 592.001,2 r90 top
C229 "100n" FP-0402-L_1_0_0_05-W_0_5-IPC_A 577.001,2 r90 top
C230 "100n" FP-0402-L_1_0_0_05-W_0_5-IPC_A 562.001,2 r90 top
C231 "1u" FP-0402-L_1_0_0_05-W_0_5-IPC_A 548.001,2 r90 top
C232 "100n" FP-0402-L_1_0_0_05-W_0_5-IPC_A 555.001,2 r90 top
C233 "100n" FP-0402-L_1_0_0_05-W_0_5-IPC_A 533.001,2 r90 top
C234 "100n" FP-0402-L_1_0_0_05-W_0_5-IPC_A 518.001,2 r90 top
C235 "100n" FP-0402-L_1_0_0_05-W_0_5-IPC_A 504.001,2 r90 top
C236 "4.7u" FP-0402-L_1_0_0_05-W_0_5-IPC_A 511.001,2 r90 top
C237 "4.7u" FP-0402-L_1_0_0_05-W_0_5-IPC_A 489.001,2 r90 top
C238 "100n" FP-0402-L_1_0_0_05-W_0_5-IPC_A 496.001,2 r90 top
C239 "100n" FP-0402-L_1_0_0_05-W_0_5-IPC_A 482.001,2 r90 top
C240 "100n" FP-0402-L_1_0_0_05-W_0_5-IPC_A 474.001,2 r90 top
C241 "100n" FP-0402-L_1_0_0_05-W_0_5-IPC_A 460.001,2 r90 top
C242 "4.7u" FP-0402-L_1_0_0_05-W_0_5-IPC_A 423.001,2 r90 top
C243 "100n" FP-0402-L_1_0_0_05-W_0_5-IPC_A 430.001,2 r90 top
C244 "4.7u" FP-0402-L_1_0_0_05-W_0_5-IPC_A 408.001,2 r90 top
C245 "100n" FP-0402-L_1_0_0_05-W_0_5-IPC_A 416.001,2 r90 top
C246 "100n" FP-0402-L_1_0_0_05-W_0_5-IPC_A 401.001,2 r90 top
C247 "100n" FP-0402-L_1_0_0_05-W_0_5-IPC_A 394.001,2 r90 top
C248 "T495D686K020ATE150" KEMT-T495-D_L 406.925,197 r180 top
D1 "PMEG3050EP,115" FP-SOD128-MFG 348,190 r90 top
D2 "150066RG54050" WL-SBCD_0606 411.001,231 r0 top
D3 "B540C-13-F" FP-SMC-MFG 457.001,207 r90 top value=300pF
D4 "150066RG54050" WL-SBCD_0606 16,206.5 r270 top
D5 "DNP" ONSC-SOD-523-2-502-01_V 528.001,216 r0 top
D6 "B540C-13-F" FP-SMC-MFG 458.001,221 r90 top value=300pF
D7 "150066RG54050" WL-SBCD_0606 1051.001,26 r0 top
D8 "150066RG54050" WL-SBCD_0606 408.001,38 r0 top
D9 "DNP" ONSC-SOD-523-2-502-01_V 536.001,189 r0 top
D10 "B540C-13-F" FP-SMC-MFG 467.001,193 r90 top value=300pF
D11_OR_0 "DNP/MM5Z3V3T1G" ONSC-SOD-523-2-502-01_V 856.001,370 r90 top (schematic designator D11)
D11_OR_1 "DNP/MM5Z3V3T1G" ONSC-SOD-523-2-502-01_V 840.001,376 r90 top (schematic designator D11)
D12_OR_0 "SMBJ33CA-TR" FP-SMB-CA-MFG 686.001,372 r90 top (schematic designator D12)
D12_OR_1 "SMBJ33CA-TR" FP-SMB-CA-MFG 675.001,379 r90 top (schematic designator D12)
D13_OR_0 "MM5Z3V3T1G" ONSC-SOD-523-2-502-01_V 568.001,370 r90 top (schematic designator D13)
D13_OR_1 "MM5Z3V3T1G" ONSC-SOD-523-2-502-01_V 562.001,376 r90 top (schematic designator D13)
D14_OR_0 "DNP/MM5Z3V3T1G" ONSC-SOD-523-2-502-01_V 482.001,370 r90 top (schematic designator D14)
D14_OR_1 "DNP/MM5Z3V3T1G" ONSC-SOD-523-2-502-01_V 479.001,376 r90 top (schematic designator D14)
D15 "1N4148W-TP" FP-SOD-123-IPC_A 497.001,311 r90 top
D16 "ESDCAN02-2BWY" FP-SOT323-3L-MFG 409.001,309 r0 top value=3pF
D17 "MM5Z3V3T1G" ONSC-SOD-523-2-502-01_V 393.001,183 r90 top
D18 "150066RG54050" WL-SBCD_0606 639.001,14 r0 top
D19 "150066RG54050" WL-SBCD_0606 734.001,2 r0 top
D20 "ESD204DQAR or PUSB3AB4Z" FP-DQA0010A-MFG 266,226 r270 top value=0.55pF
F1 "1" FP-0685T-MFG 301,211 r0 bottom
F2 "1210L050YR" FP-1210L050YR-MFG 1157.001,26 r0 top
F3 "1210L050YR" FP-1210L050YR-MFG 1023.001,26 r0 top
F4 "1210L050YR" FP-1210L050YR-MFG 888.001,26 r0 top
F5 "1210L050YR" FP-1210L050YR-MFG 779.001,26 r0 top
F6 "15" FP-0685T-MFG 457.001,177 r0 top
F7 "2.5" FP-0685T-MFG 1173.001,52 r0 top
F8 ".5" FP-0685T-MFG 1168.001,52 r0 top
F9 "2" FP-0685T-MFG 1155.001,52 r0 top
F10 "3" FP-0685T-MFG 1150.001,52 r0 top
F11 "1" FP-0685T-MFG 1144.001,52 r0 top
F12 "1" FP-0685T-MFG 1121.001,52 r0 top
F13 "2" FP-0685T-MFG 371,226 r0 top
F14 "1" FP-0685T-MFG 1104.001,52 r0 top
F15 "2" FP-0685T-MFG 299,226 r0 top
F16 ".5" FP-0685T-MFG 346.5,221.5 r0 top
F17 ".5" FP-0685T-MFG 853.001,52 r0 top
F18_PWR_PROT_0 "SF-1206FP200-2" FP-SF-1206FP-MFG 442.001,385 r90 top (schematic designator F18)
F18_PWR_PROT_1 "SF-1206FP200-2" FP-SF-1206FP-MFG 441.001,393 r90 top (schematic designator F18)
F18_PWR_PROT_2 "SF-1206FP200-2" FP-SF-1206FP-MFG 442.001,402 r90 top (schematic designator F18)
J1 "RPI CM5 W/ COOLER" "RPI CM5 W_ COOLER-Footprint-1" 339,209 r180 top locked
J2 "1-2199230-6" FP-1-2199230-6-MFG 291,194.5 r270 bottom
J3 "776163-1" FP-776163-1-MFG 1212.001,90 r90 top
J4 "208658-1052" 208658-1052-Footprint-1 335,236 r180 top
J5 "292303-7" FP-292303-7-MFG 359,230 r270 top
J6 "208658-1052" 208658-1052-Footprint-1 311,236 r180 top
J7 "292303-7" FP-292303-7-MFG 287,230 r270 top
J8 "B8B-XH-AM(LF)(SN)" FP-B8B-XH-AM_LF_SN-MFG 934.001,63 r90 top
J9 "B8B-XH-AM(LF)(SN)" FP-B8B-XH-AM_LF_SN-MFG 941.001,63 r90 top
J10 "B3B-XH-AM(LF)(SN)" FP-B3B-XH-AM_LF_SN-MFG 949.001,57 r90 top
J11 "B3B-XH-AM(LF)(SN)" FP-B3B-XH-AM_LF_SN-MFG 920.001,57 r90 top
J12 "FM4-NZRP-PCB-1" FM4-NZRP-PCB-1-Footprint-1 901.001,57 r90 top
J13 "BM04B-SRSS-TBT(LF)(SN)" FP-BM04B-SRSS-TBT_LF_SN-MFG 339,220.5 r0 top
J14 "47053-1000" FP-470531000-MFG 868.001,57 r90 top
J15 "E6S20A-40MT5-Z" E6S20A-40MT5-Z-Footprint-1 755.001,58 r0 top
J16 "FA1-NDRP-PCB-8" FA1-NDRP-PCB-8-Footprint-1 629.001,56 r0 top
J17 "12402012E212A" 12402012E212A-Footprint-1 266,234 r180 top
J18 "48409-0003" 48409-0003-Footprint-1 359,208 r180 top
J19 "826629-2" FP-826629-2-MFG 776.001,4 r90 top
J20 "826629-2" FP-826629-2-MFG 782.001,4 r90 top
J21 "826629-2" FP-826629-2-MFG 666.001,4 r90 top
J22 "826629-2" FP-826629-2-MFG 671.001,4 r90 top
L1 "SRR1260-150M" FP-SRR1260-MFG 469.001,209 r0 top
L2 "SRR1260-220M" FP-SRR1260-MFG 475.001,222 r0 top
L3 "744066101" WE-TPC_1038 1166.001,30 r0 top
L4 "ADL32VHC-220M" FP-1210POC-MFG 1137.001,26 r0 top value=22uH
L5 "PFL1609-561MEW" FP-PFL1609-MFG 1141.001,26 r0 top value=0.56uH
L6 "744066101" WE-TPC_1038 1032.001,30 r0 top
L7 "ADL32VHC-220M" FP-1210POC-MFG 1013.001,26 r0 top value=22uH
L8 "PFL1609-561MEW" FP-PFL1609-MFG 1017.001,26 r0 top value=0.56uH
L9 "744066101" WE-TPC_1038 897.001,30 r0 top
L10 "ADL32VHC-220M" FP-1210POC-MFG 877.001,26 r0 top value=22uH
L11 "PFL1609-561MEW" FP-PFL1609-MFG 882.001,26 r0 top value=0.56uH
L12 "744066101" WE-TPC_1038 788.001,30 r0 top
L13 "ADL32VHC-220M" FP-1210POC-MFG 767.001,26 r0 top value=22uH
L14 "PFL1609-561MEW" FP-PFL1609-MFG 772.001,26 r0 top value=0.56uH
L15 "LQW18AN27NJ00D" FP-LQW18AN_00-MFG 538.001,37 r0 top
L16 "SRR1260-150M" FP-SRR1260-MFG 478.001,195 r0 top
L17 "SRF4532-510Y" FP-SRF4532-MFG 430.001,310 r0 top
L18 "ACT1210G-800-2P-TL10" FP-ACT1210G-800-2P-TL10-MFG 854.001,2 r0 top
MH1 "PTHV6" "PTHV6 M2" 299,231 r0 top net-tie
MH2 "PTHV6" "PTHV6 M2" 323,231 r0 top net-tie
MH3 "PTHV6" "PTHV6 M2" 347,231 r0 top net-tie
MH4 "PTHV6" "PTHV6 M2" 371,231 r0 top net-tie
MH5 "PTHV6" "PTHV6 M2" 275,231 r0 top net-tie
MH6 "PTHV6" "PTHV6 M2" 717.001,54 r0 top net-tie
MH7 "PTHV6" "PTHV6 M2" 645.001,54 r0 top net-tie
MH8 "PTHV6" "PTHV6 M2" 651.001,54 r0 top net-tie
MH9 "PTHV6" "PTHV6 M2" 658.001,54 r0 top net-tie
MH10 "PTHV6" "PTHV6 M2" 664.001,54 r0 top net-tie
MH11 "PTHV6" "PTHV6 M2" 671.001,54 r0 top net-tie
MH12 "PTHV6" "PTHV6 M2" 678.001,54 r0 top net-tie
MH13 "PTHV6" "PTHV6 M2" 613.001,54 r0 top net-tie
MH14 "PTHV6" "PTHV6 M2" 620.001,54 r0 top net-tie
MP1 "9774025243R" 9774025243 371,194.5 r180 bottom
Q2 "FDC6327C" FAIR-SOT23-6_V 1097.001,26 r0 top
Q3 "BSS84AKS,115" NXP-SOT363_L 951.001,26 r0 top
Q4 "FDC6327C" FAIR-SOT23-6_V 968.001,26 r0 top
Q5 "FDC6327C" FAIR-SOT23-6_V 831.001,26 r0 top
Q6 "FDC6327C" FAIR-SOT23-6_V 730.001,26 r0 top
Q7 "SISH615ADN-T1-GE3" SISH615ADN-T1-GE3-Footprint-1 439.001,178 r0 top
Q8 "SISH615ADN-T1-GE3" SISH615ADN-T1-GE3-Footprint-1 427.001,178 r0 top
Q9 "BSS138W-7-F" DIOD-SOT323-3_V 401.001,177 r0 top
Q10 "DMG1013UW-7" DIOD-SOT323-3_V 479.001,37 r0 top
Q11 "BSS138W-7-F" DIOD-SOT323-3_V 440.001,37 r0 top
Q12 "BSS138W-7-F" DIOD-SOT323-3_V 784.001,52 r0 top
Q13_OR_0 "ISC011N06LM5ATMA1" FP-PG-TDSON-8-MFG 832.001,372 r90 top (schematic designator Q13)
Q13_OR_1 "ISC011N06LM5ATMA1" FP-PG-TDSON-8-MFG 817.001,378 r90 top (schematic designator Q13)
Q14_OR_0 "ISC011N06LM5ATMA1" FP-PG-TDSON-8-MFG 845.001,372 r90 top (schematic designator Q14)
Q14_OR_1 "ISC011N06LM5ATMA1" FP-PG-TDSON-8-MFG 830.001,378 r90 top (schematic designator Q14)
Q15 "SISH615ADN-T1-GE3" SISH615ADN-T1-GE3-Footprint-1 469.001,184 r0 top
Q16 "SISH615ADN-T1-GE3" SISH615ADN-T1-GE3-Footprint-1 449.001,184 r0 top
Q17 "BSS138W-7-F" DIOD-SOT323-3_V 421.001,183 r0 top
R1 "330" R0603B 621.001,315 r0 top value=220
R2 "33" R0603B 616.001,315 r0 top value=220
R3 "33" R0603B 589.001,315 r0 top value=220
R4 "47k" R0603B 593.001,315 r0 top
R5 "100k" R0603B 569.001,315 r0 top
R6 "DNP" RESC1005X40X25ML05T05 573.001,315 r0 top
R7 "47k" R0603B 577.001,315 r0 top
R8 "DNP" RESC1005X40X25ML05T05 564.001,315 r0 top
R9 "100k" R0603B 560.001,315 r0 top
R10 "0402 JUMPER" RESC1005X40X25ML05T05 541.001,315 r90 top
R11 "47k" R0603B 548.001,315 r0 top
R12 "100k" R0603B 530.001,316 r90 top
R13 "0402 JUMPER" RESC1005X40X25ML05T05 536.001,315 r90 top
R14 "47k" R0603B 517.001,316 r90 top
R15 "100k" R0603B 506.001,316 r90 top
R16 "DNP" RESC1005X40X25ML05T05 512.001,315 r90 top
R17 "0402 JUMPER" RESC1005X40X25ML05T05 500.001,315 r90 top
R18 "47k" R0603B 488.001,316 r90 top
R19 "2.2k" R0603B 468.001,316 r90 top
R20 "1k" R0603B 473.001,316 r90 top
R21 "1M" R0603B 411.001,315 r0 top
R22 "DNP" RESC1005X40X25ML05T05 510.001,230 r90 top
R23 "DNP" RESC1005X40X25ML05T05 505.001,230 r90 top
R24 "100k" R0603B 499.001,231 r90 top
R25 "DNP" RESC1005X40X25ML05T05 474.001,230 r90 top
R26 "DNP" RESC1005X40X25ML05T05 463.001,230 r90 top
R27 "DNP" RESC1005X40X25ML05T05 469.001,230 r90 top
R28 "DNP" RESC1005X40X25ML05T05 457.001,230 r90 top
R29 "DNP" R0603B 451.001,231 r90 top
R30 "DNP" RESC1005X40X25ML05T05 307,205.5 r90 top
R31 "1k" R0603B 406.001,230 r0 top
R32 "1k" R0603B 394.001,231 r90 top
R33 "1k" R0603B 533.001,203 r90 top
R34 "DNP" R0603B 528.001,203 r90 top
R35 "DNP" R0603B 516.001,203 r90 top
R36 "ERT-J1VR103J" RESC1608X90X30ML15T20 523.001,203 r0 top
R37 "1k" R0603B 477.001,203 r90 top
R38 "100k" R0603B 405.001,203 r90 top
R39 "100k" R0603B 399.001,203 r90 top
R40 "100k" R0603B 394.001,203 r90 top
R41 "0402 JUMPER" RESC1005X40X25ML05T05 300,194 r0 bottom
R42 "0402 JUMPER" RESC1005X40X25ML05T05 300,192.5 r0 bottom
R43 "0402 JUMPER" RESC1005X40X25ML05T05 300,191 r0 bottom
R44 "330" R0603B 299.5,188.5 r270 bottom
R45 "100k" R0603B 303,194 r180 bottom
R46 "100k" R0603B 303,192.5 r180 bottom
R47 "1k" R0603B 19.5,207.5 r0 top
R48 "DNP" R0603B 304.5,208.5 r180 bottom
R49 "1k" R0603B 19.5,206 r0 top
R50 "1k" R0603B 304.5,210 r0 bottom
R51 "100k" R0603B 304.5,207 r180 bottom
R56 "100k" R0603B 417.001,134 r90 top
R57 "100k" R0603B 411.001,134 r90 top
R58_ADC_0 "56" R0603B 438.001,347 r90 top (schematic designator R58)
R58_ADC_1 "56" R0603B 437.001,359 r90 top (schematic designator R58)
R59 "DNP" R0603B 416.001,289 r90 top
R60 "1k" R0603B 411.001,289 r90 top
R61 "100k" R0603B 394.001,289 r0 top
R62 "1k" R0603B 544.001,217 r90 top
R63 "DNP" R0603B 538.001,217 r90 top
R64 "ERT-J1VR103J" RESC1608X90X30ML15T20 533.001,217 r0 top
R65 "DNP" RESC1005X40X25ML05T05 522.001,217 r90 top
R66 "1k" R0603B 501.001,217 r90 top
R67 "100k" R0603B 463.001,217 r90 top
R68 "10k" R0603B 399.001,217 r90 top
R69 "100k" R0603B 394.001,217 r90 top
R70 "PE1206DRM7W0R05L" R1206B 1131.001,26 r0 top value=100k
R71 "DNP" R0603B 1125.001,25 r0 top
R72 "100k" R0603B 1119.001,26 r90 top
R73 "5.1k" R0603B 1113.001,26 r90 top
R74 "10k" R0603B 1084.001,26 r90 top
R75 "49.9" R0603B 1078.001,26 r90 top
R76 "1k" R0603B 1072.001,26 r90 top
R77 "100k" R0603B 1067.001,26 r90 top
R78 "1k" R0603B 1061.001,26 r90 top
R79 "100k" R0603B 1045.001,26 r90 top
R80 "1k" R0603B 1039.001,26 r90 top
R81 "1k" R0603B 1001.001,25 r0 top
R82 "PE1206DRM7W0R05L" R1206B 1008.001,26 r0 top value=100k
R83 "DNP" R0603B 995.001,26 r90 top
R84 "100k" R0603B 989.001,26 r90 top
R85 "5.1k" R0603B 983.001,26 r90 top
R86 "402" R0603B 961.001,26 r90 top
R87 "1k" R0603B 955.001,26 r90 top
R88 "10k" R0603B 939.001,26 r90 top
R89 "100k" R0603B 933.001,26 r90 top
R90 "49.9" R0603B 928.001,26 r90 top
R91 "1k" R0603B 923.001,25 r0 top
R92 "100k" R0603B 916.001,26 r90 top
R93 "PE1206DRM7W0R05L" R1206B 872.001,26 r0 top value=100k
R94 "100k" R0603B 865.001,26 r90 top
R95 "5.1k" R0603B 847.001,26 r90 top
R96 "49.9" R0603B 818.001,26 r90 top
R97 "1k" R0603B 813.001,26 r90 top
R98 "100k" R0603B 807.001,26 r90 top
R99 "100k" R0603B 795.001,26 r90 top
R100 "PE1206DRM7W0R05L" R1206B 759.001,27 r90 top value=100k
R101 "100k" R0603B 752.001,26 r90 top
R102 "5.1k" R0603B 745.001,26 r90 top
R103 "49.9" R0603B 716.001,26 r90 top
R104 "1k" R0603B 709.001,26 r90 top
R105 "100k" R0603B 702.001,26 r90 top
R106 "120" R0603B 673.001,26 r90 top
R107 "0" R0603B 642.001,26 r90 top
R108 "0" R0603B 629.001,26 r90 top
R109 "0" R0603B 622.001,26 r90 top